# Altium PCB МПСУ.464342.21-005 T5M 4Layer.PcbDoc
Units mm, origin at the board's own origin, x right, y up, seen from the top; angles counter-clockwise.
Board outline 110 x 82.5 mm, 4 copper layers (Top Layer, RF_Ground, PWR, Bottom Layer), stack 1.167 mm thick; 67 components, 36 nets, 235 pads, 1466 vias.
Unrouted connection lines stored in the file: 90.
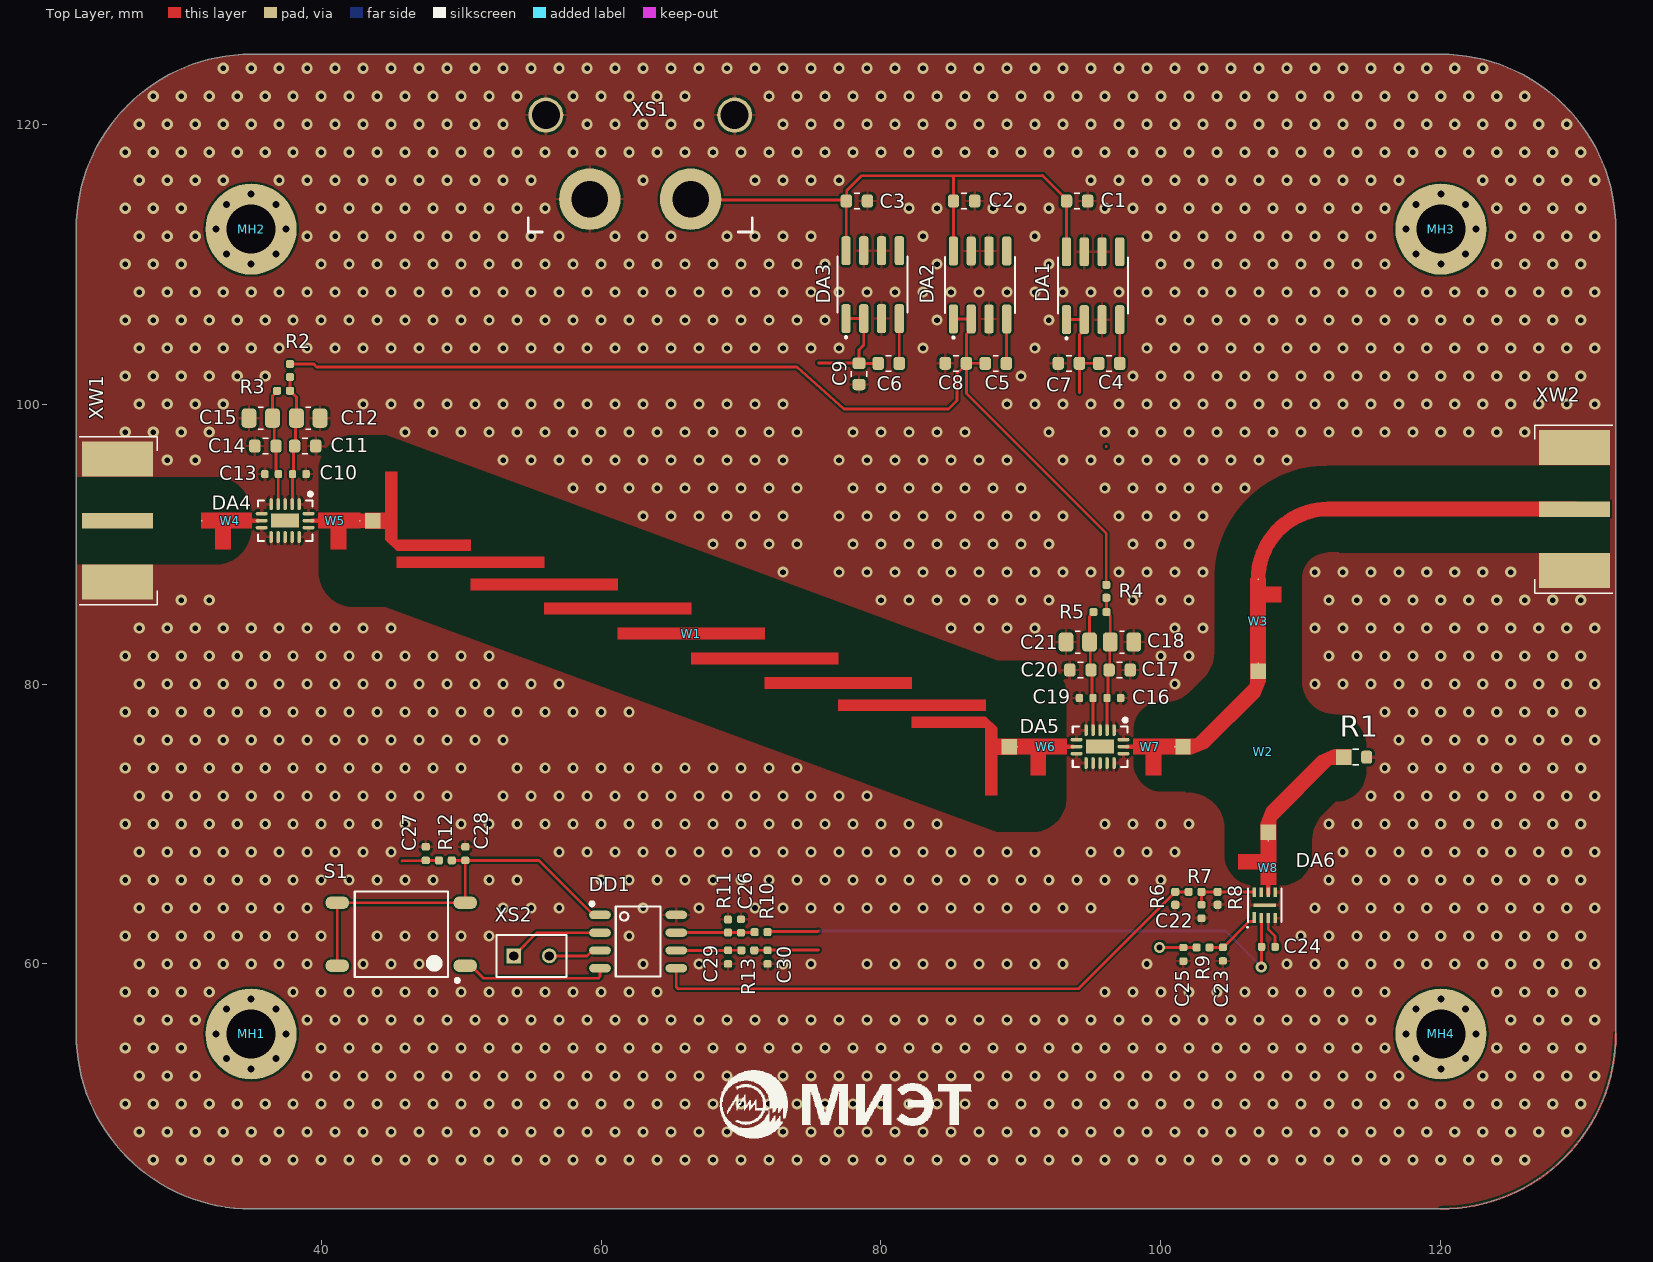
[diagram p0: Top Layer view]
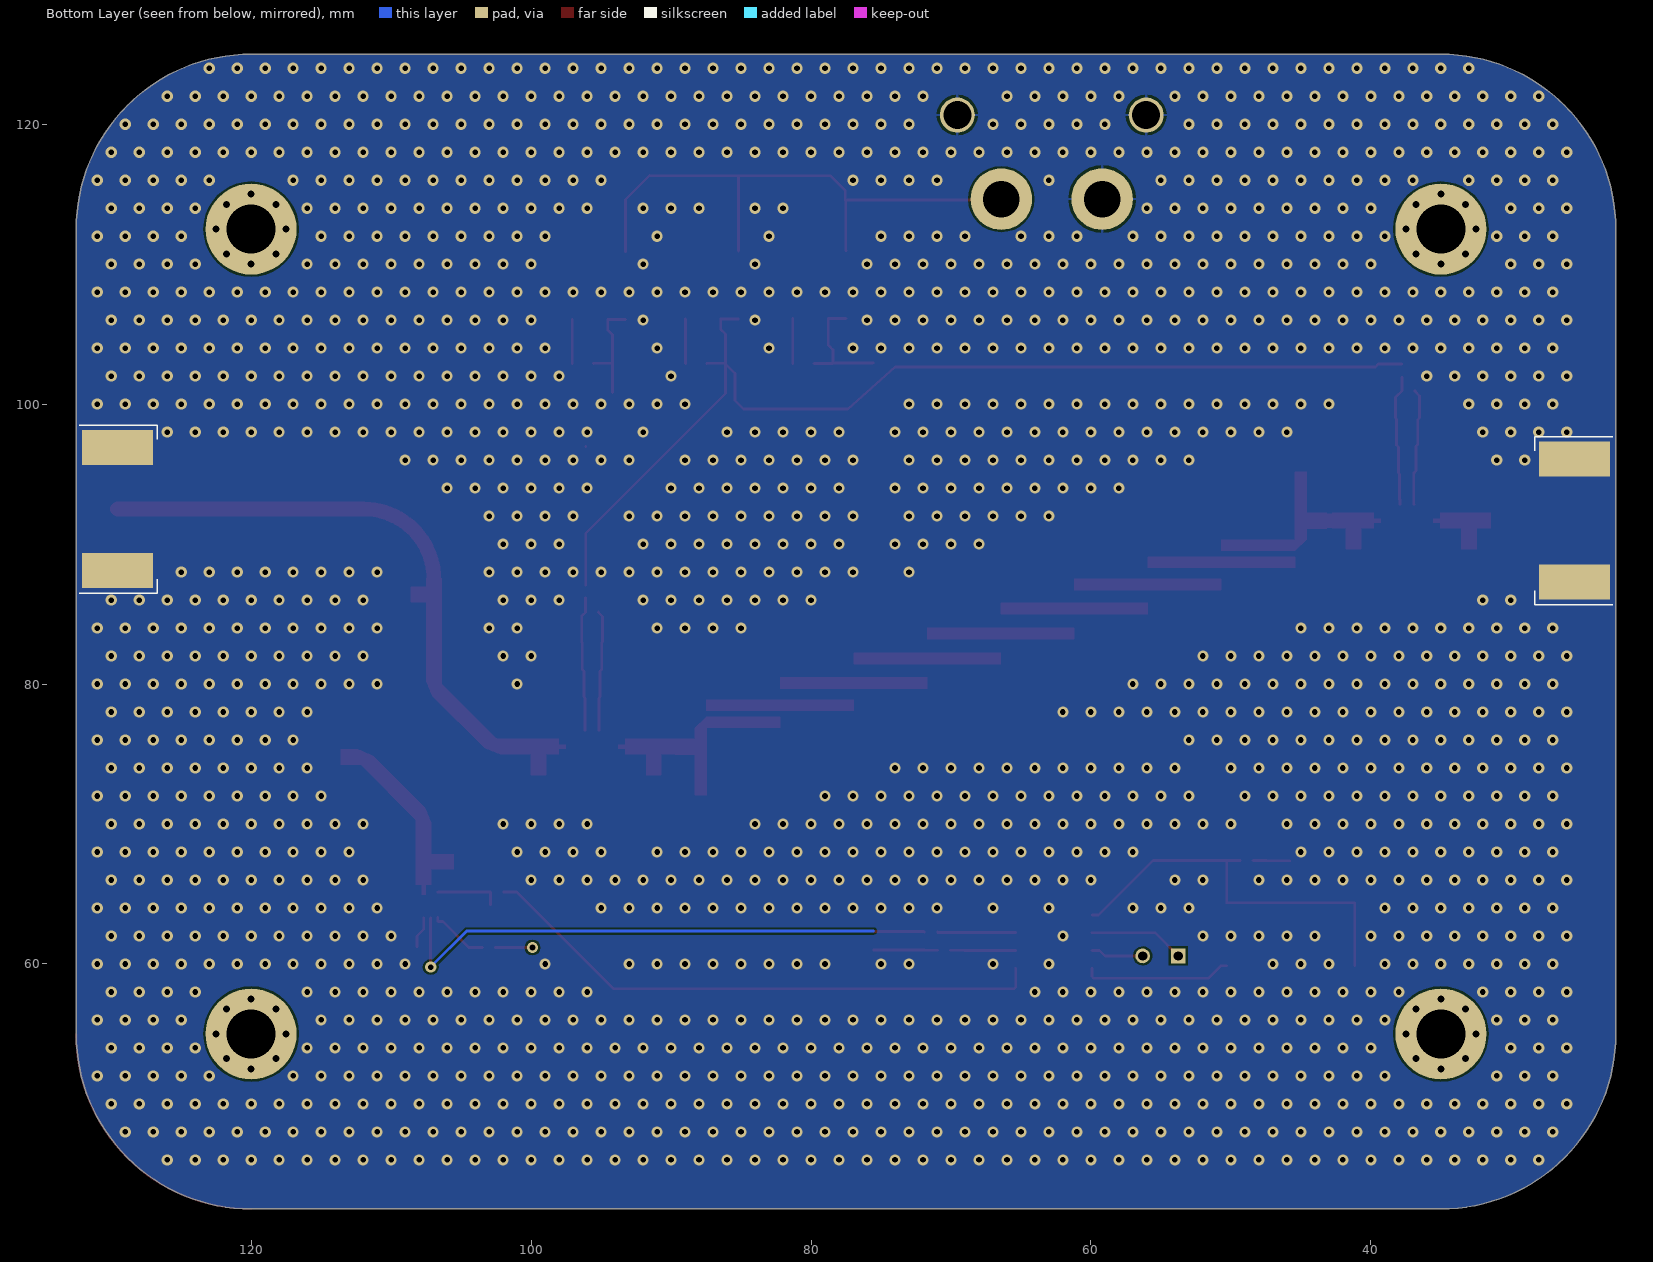
[diagram p1: Bottom Layer view, seen from below]
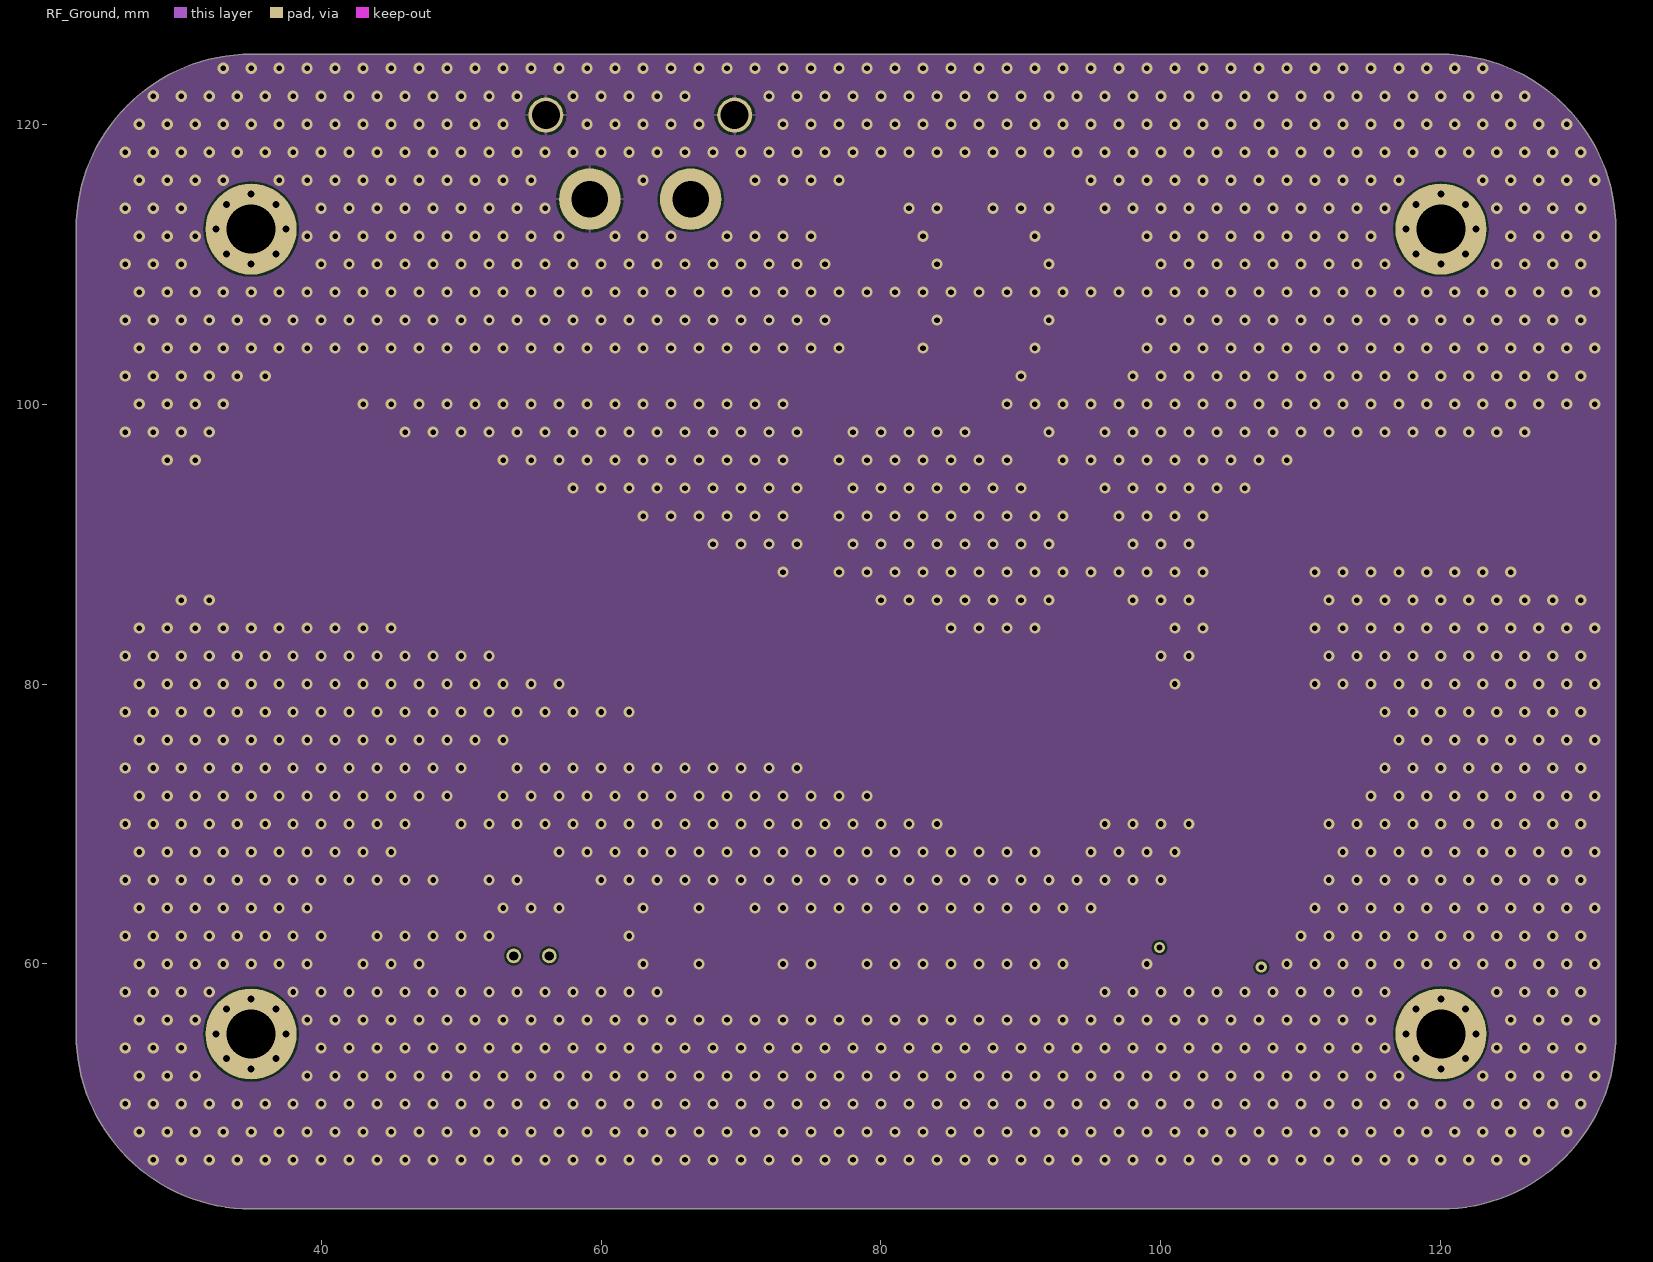
[diagram p2: RF_Ground]
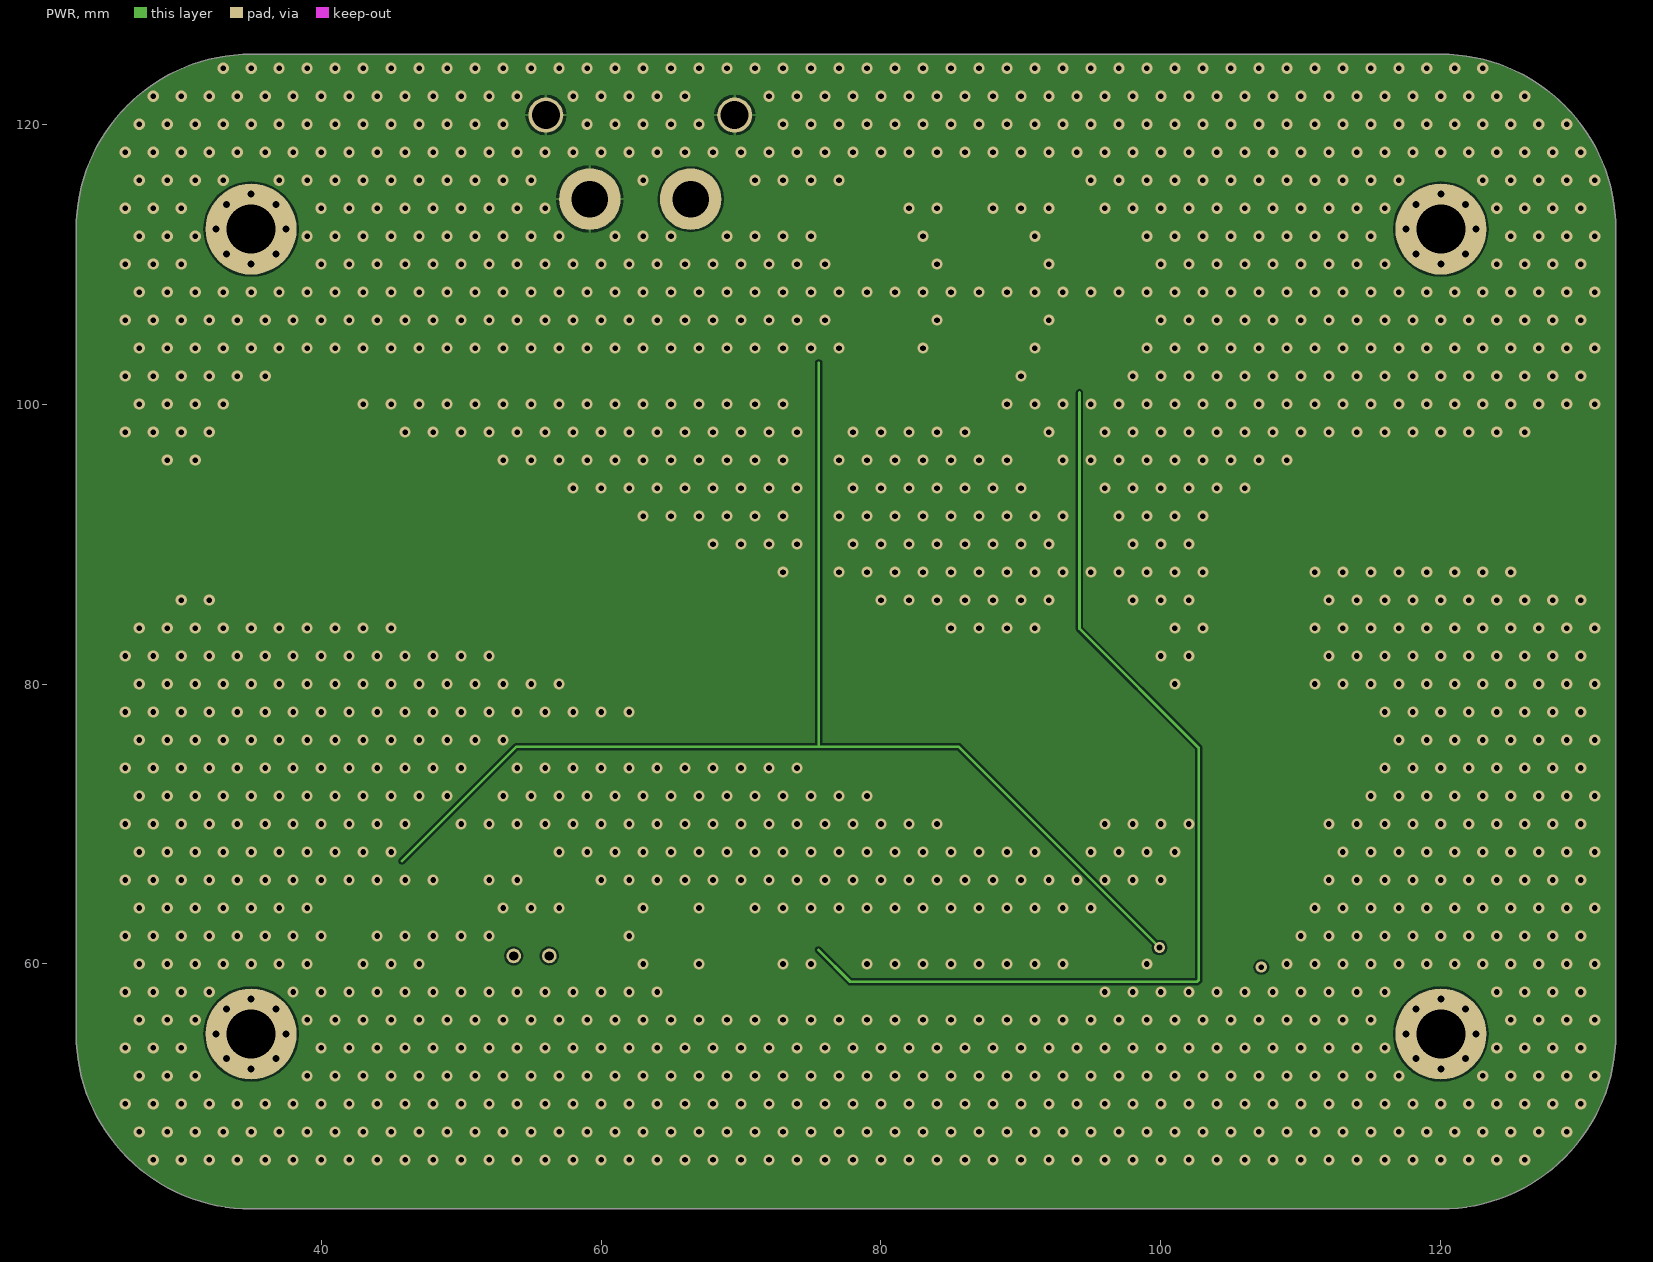
[diagram p3: PWR]

## Layer stack, top to bottom
Top Solder: solder mask 0.0102, Solder Resist, Dk 3.5
Top Layer: signal copper 0.018
RF_Dielectric: core 0.51, FR4, Dk 4.6
RF_Ground: signal copper 0.018
Dielectric 1: prepreg 0.075, 49NP, Dk 4.4
PWR: signal copper 0.018
Dielectric 2: core 0.51, FR4, Dk 4.6
Bottom Layer: signal copper 0.018
Bottom Solder: solder mask 0.0102, Solder Resist, Dk 3.5

## Board outline
22.5,55 22.5,112.5 cw(c35,112.5) 35,125 120,125 cw(c120,112.5) 132.5,112.5 132.5,55 cw(c120,55) 120,42.5 35,42.5 cw(c35,55)

## Design rules (kind name [scope] priority, off if disabled: settings)
AcuteAngle [All] p1: minimum=6.00000000000000E+0001 checktracksonly=FALSE
BoardOutlineClearance [OnCopper] p1: gap=0.25 ignorepadtopadclearanceinfootprint=FALSE except(0: Poly-OutlineEdge)
Clearance Clearance_RFGND [InComponentClass('RF') vs InNet('GND')] p1 off: gap=5 ignorepadtopadclearanceinfootprint=FALSE
Clearance [All] p2: gap=0.15 ignorepadtopadclearanceinfootprint=FALSE
ComponentClearance ComponentClearance_Matching [InComponentClass('RF')] p1: gap=-3 collisioncheckmode=3 verticalgap=2540 showdistances=FALSE
ComponentClearance [All] p2: gap=0.2 collisioncheckmode=3 verticalgap=2540 showdistances=TRUE
HoleSize [All] p1: absolutevalues=TRUE maxlimit=3.5 minlimit=0.4 maxpercent=80.000 minpercent=20.000
HoleToHoleClearance [All] p1: gap=0.2 allowstackedmicrovias=FALSE
MinimumAnnularRing MinimumAnnularRingVIA [IsVia] p1: minimumring=0.15
MinimumAnnularRing MinimumAnnularRingPAD [IsPad] p2: minimumring=0.2
MinimumSolderMaskSliver [All] p1: minsoldermaskwidth=0.15
PermittedLayers [All] p1: toplayerpermitted=TRUE bottomlayerpermitted=TRUE
PolygonConnect PolygonConnectMH [HasFootprint('MH_M3')] p1: connectstyle=Relief reliefconductorwidth=0.3 reliefentries=4 polygonreliefangle="90 Angle" airgapwidth=0.5
PolygonConnect PolygonConnectFilterGND [IsPad and InComponent('W1') and InNet('GND')] p2: connectstyle=Direct reliefconductorwidth=0.254 reliefentries=4 polygonreliefangle="90 Angle" airgapwidth=0.254
PolygonConnect PolygonConnectRFCons [InComponentClass('RFCons') and InNet('GND')] p3: connectstyle=Direct reliefconductorwidth=0.254 reliefentries=4 polygonreliefangle="90 Angle" airgapwidth=0.254
PolygonConnect PolygonConnectGNDVia [IsVia and InNet('GND')] p4: connectstyle=Direct reliefconductorwidth=0.254 reliefentries=4 polygonreliefangle="90 Angle" airgapwidth=0.254
PolygonConnect PolygonConnectRF [InNet('GND') and InComponentClass('RF')] p5: connectstyle=Relief reliefconductorwidth=0.2 reliefentries=4 polygonreliefangle="90 Angle" airgapwidth=0.2
PolygonConnect [All] p6: connectstyle=Relief reliefconductorwidth=0.2 reliefentries=4 polygonreliefangle="90 Angle" airgapwidth=0.2
RoutingCorners RoutingCorners_RF [InNetClass('RF')] p1: cornerstyle=Round minsetback=1.1 maxsetback=5
RoutingCorners [All] p2: cornerstyle=45-Degree minsetback=2.54 maxsetback=2.54
RoutingLayers RoutingLayersRF [InNetClass('RF')] p1: top layer_v5=TRUE mid layer 1_v5=TRUE mid layer 2_v5=TRUE bottom layer_v5=FALSE
RoutingLayers [All] p2: top layer_v5=TRUE mid layer 1_v5=TRUE mid layer 2_v5=TRUE bottom layer_v5=TRUE
RoutingVias [All] p1: holewidth=0.4 width=0.8 viastyle="Through Hole" minholewidth=0.4 minwidth=0.8 maxholewidth=0.4 maxwidth=0.8
SilkToSilkClearance [All] p1: silktosilkclearance=0.15
SilkToSolderMaskClearance [IsPad] p1: minsilkscreentomaskgap=0.15 clearancetoexposedcopper=TRUE
SolderMaskExpansion SolderMaskExpansionGNDVia [IsVia and InNet('GND')] p1: expansion=0.102 istentingtop=TRUE
SolderMaskExpansion [All] p2: expansion=0.05 istentingtop=FALSE
UnConnectedPin [All] p1:
Width WidthRF [InNetClass('RF')] p1: maxlimit=1.15 minlimit=1.05 preferedwidth=1.1
Width [All] p2: maxlimit=0.5 minlimit=0.2 preferedwidth=0.3
22 further rules are at their usual default settings.

## Classes and differential pairs
component class RFDevices: DA4 DA5 DA6
component class RFCons: XW1 XW2
component class RF: W1 W2 W3 W4 W5 W6 W7 W8
channel class "МПСУ.464342.21-005 Э3 Лист2": LNA1 LNA2
net class RF: LNA_RF_IN_LNA1 LNA_RF_IN_LNA2 LNA_RF_OUT_LNA1 LNA_RF_OUT_LNA2 LTC_RF_IN NetDA4_7 NetDA4_15 NetDA5_7 NetDA5_15 NetDA6_6 NetR1_2 NetW2_3 NetW3_2
component class "МПСУ.464342.21-005 Э3 Лист8": R1 W1 W2 W3 XS1 XW1 XW2
component class PowerManagment: C1 C2 C3 C4 C5 C6 C7 C8 C9 DA1 DA2 DA3
component class PowerDetector: C22 C23 C24 C25 C26 DA6 R6 R7 R8 R9 R10 R11 W8
component class Microcontroller: C27 C28 C29 C30 DD1 R12 R13 S1 XS2
component class LNA2: C16 C17 C18 C19 C20 C21 DA5 R4 R5 W6 W7
component class LNA1: C10 C11 C12 C13 C14 C15 DA4 R2 R3 W4 W5

## Components (designator, comment, footprint, x,y, rotation, side; value= is the part's Value field where it differs from the comment)
C1 "1 uF" CAPC160X80X90L30N 94.01,114.51 r180 top value="100 pF"
C2 "1 uF" CAPC160X80X90L30N 85.935,114.51 r180 top value="100 pF"
C3 "1 uF" CAPC160X80X90L30N 78.28,114.51 r180 top value="100 pF"
C4 "10 pF" CAPC160X80X90L30N 96.305,102.91 r0 top value="100 pF"
C5 "10 pF" CAPC160X80X90L30N 88.2,102.91 r0 top value="100 pF"
C6 "10 pF" CAPC160X80X90L30N 80.55,102.91 r0 top value="100 pF"
C7 "10 uF" CAPC160X80X90L30N 93.425,102.915 r0 top value="100 pF"
C8 "10 uF" CAPC160X80X90L30N 85.345,102.915 r0 top value="100 pF"
C9 "10 uF" CAPC160X80X90L30N 78.43,102.155 r90 top value="100 pF"
C10 "100 pF" CAPC100X50X55L20N 38.44,95 r180 top
C11 "1 uF" CAPC160X80X90L30N 38.855,97 r180 top value="100 pF"
C12 "0.33 uF" CAPC200X125X95L50N 39.075,99 r180 top value="100 pF"
C13 "100 pF" CAPC100X50X55L20N 36.465,95 r180 top
C14 "1 uF" CAPC160X80X90L30N 36.02,97 r180 top value="100 pF"
C15 "0.33 uF" CAPC200X125X95L50N 35.685,99 r180 top value="100 pF"
C16 "100 pF" CAPC100X50X55L20N 96.635,79 r180 top (schematic designator C10)
C17 "1 uF" CAPC160X80X90L30N 97.05,81 r180 top value="100 pF" (schematic designator C11)
C18 "0.33 uF" CAPC200X125X95L50N 97.225,83 r180 top value="100 pF" (schematic designator C12)
C19 "100 pF" CAPC100X50X55L20N 94.665,79 r180 top (schematic designator C13)
C20 "1 uF" CAPC160X80X90L30N 94.25,81 r180 top value="100 pF" (schematic designator C14)
C21 "0.33 uF" CAPC200X125X95L50N 94.06,83 r180 top value="100 pF" (schematic designator C15)
C22 "10 pF" CAPC100X50X55L20N 102.9,63.75 r90 top value="100 pF" (schematic designator C16)
C23 "OPT" CAPC100X50X55L20N 104.425,60.7 r90 top value="100 pF" (schematic designator C17)
C24 "10 nF" CAPC100X50X55L20N 107.675,61.225 r180 top value="100 pF" (schematic designator C18)
C25 "100 nF" CAPC100X50X55L20N 101.6,60.69 r90 top value="100 pF" (schematic designator C19)
C26 "1 uF" CAPC100X50X55L20N 70,62.715 r270 top value="100 pF" (schematic designator C20)
C27 "100 nF" CAPC100X50X55L20N 47.475,67.885 r270 top (schematic designator C21)
C28 "OPT" CAPC100X50X55L20N 50.3,67.885 r270 top (schematic designator C22)
C29 "OPT" CAPC100X50X55L20N 69.075,60.49 r90 top (schematic designator C23)
C30 "100 nF" CAPC100X50X55L20N 71.9,60.49 r90 top (schematic designator C24)
DA1 "LT1763-1.5" SOIC8P127_490X600X175L83X41N 95.155,108.46 r0 top
DA2 "LT1763-2.5" SOIC8P127_490X600X175L83X41N 87.08,108.51 r0 top
DA3 "LT1763-3.3" SOIC8P127_490X600X175L83X41N 79.405,108.535 r0 top
DA4 "PMA-183PLN+" JV2579 37.425,91.675 r180 top
DA5 "PMA-183PLN+" JV2579 95.65,75.525 r180 top (schematic designator DA4)
DA6 "LTC5597" LTC5597 107.425,64.2 r0 top (schematic designator DA5)
DD1 "PIC12F1822-I/SN" SN-SOIC127P600X175-8N 62.65,61.6 r0 top
MH1 "Comment" MH_M3#1 35,55 r0 top
MH2 "Comment" MH_M3#2 35,112.5 r0 top
MH3 "Comment" MH_M3#3 120,112.5 r0 top
MH4 "Comment" MH_M3#4 120,55 r0 top
R1 "50 Ohm" RESC160X80X60L30N 113.925,74.775 r180 top value=10
R2 "10 Ohm" RESC100X50X40L25N 37.775,102.4 r270 top value=10
R3 "180 Ohm" RESC100X50X40L25N 37.315,100.95 r180 top value=10
R4 "10 Ohm" RESC100X50X40L25N 96.1,86.625 r270 top value=10 (schematic designator R2)
R5 "180 Ohm" RESC100X50X40L25N 95.65,85.15 r180 top value=10 (schematic designator R3)
R6 "OPT" RESC100X50X40L25N 101.025,64.69 r90 top value=10 (schematic designator R4)
R7 "2 kOhm" RESC100X50X40L25N 102.44,65.15 r0 top value=10 (schematic designator R5)
R8 "3 k" RESC100X50X40L25N 104.05,64.69 r90 top value=10 (schematic designator R6)
R9 "1 Ohm" RESC100X50X40L25N 103.015,61.175 r180 top value=10 (schematic designator R7)
R10 "100 Ohm" RESC100X50X40L25N 71.43,62.275 r180 top value=10 (schematic designator R8)
R11 "OPT" RESC100X50X40L25N 69.065,62.71 r270 top value=10 (schematic designator R9)
R12 "1 Ohm" RESC100X50X40L25N 48.875,67.4 r180 top (schematic designator R10)
R13 "1 Ohm" RESC100X50X40L25N 70.485,60.975 r0 top value=10 (schematic designator R11)
S1 "L-KLS7-TS6604-4.3-180-B" DIP2_SOIC450P1000X350-4N 45.725,62.125 r180 top
W1 "Filter" MFilter8_5G 43.15,91.675 r0 top net-tie
W2 "Colinear Coupler" CLCoupler 107.675,69.4 r90 top net-tie
W3 "Matching" MATCHING_MAIN_OUT 106.95,81.45 r90 top net-tie
W4 "Matching" MATCHING_LNA_IN 35.525,91.675 r0 top net-tie
W5 "Matching" MATCHING_LNA_OUT 39.3,91.675 r0 top net-tie
W6 "Matching" MATCHING_LNA_IN 93.786,75.529 r0 top net-tie (schematic designator W4)
W7 "Matching" MATCHING_LNA_OUT 97.525,75.525 r0 top net-tie (schematic designator W5)
W8 "Matching" MATCHING_LTC_IN 107.675,64.95 r270 top net-tie (schematic designator W6)
XS1 "XT-60-PW-F" XT-60-PW-F 62.8,114.65 r0 top
XS2 "PBD-2 2x1" RHDRV2W45P254_1X2_304X500H500 53.76,60.575 r90 top
XW1 "MOLEX 73251-1153" "MOLEX 73251-1153 - 1.1pin" 22.5,91.675 r0 top
XW2 "MOLEX 73251-1153" "MOLEX 73251-1153 - 1.1pin" 132.5,92.5 r180 top

## Footprints (in the part's own frame and the unit in brackets; to place one, negate y for a bottom-side part, rotate by r counter-clockwise, add the part's x,y. Pads: shape width x height; smd on the part's side, far side on the other; paste and mask are expansions set on the pad)
CAPC100X50X55L20N [mm] "Capacitor, Chip; 1.00 mm L X 0.50 mm W X 0.55 mm H body"
  rrect49% 0.53x0.58 smd: 1(-0.485,0) 2(0.485,0)
  body extent -0.5,-0.25 0.5,0.25, height 0.55
CAPC160X80X90L30N [mm] "Capacitor, Chip; 1.60 mm L X 0.80 mm W X 0.90 mm H body"
  rrect51% 0.82x0.93 smd: 1(-0.755,0) 2(0.755,0)
  silkscreen extent -0.2,-0.55 0.2,0.55, body extent -0.8,-0.4 0.8,0.4, height 0.9
CAPC200X125X95L50N [mm] "Capacitor, Chip; 2.00 mm L X 1.25 mm W X 0.95 mm H body"
  rrect48% 1.05x1.38 smd: 1(-0.84,0) 2(0.84,0)
  silkscreen extent -0.17,-0.78 0.17,0.78, body extent -1,-0.63 1,0.63, height 0.95
CLCoupler [mm] "Coupler 40 dB, diel RO4003 0.5 oz ED 20 mil"
  rect 1.1x1.1 smd paste-0.55 mask-0.55: 1(0,0) 2(5.375,-5.375) 3(11.5,0.725) 4(6.125,6.1)
  Top Layer region: 5.575,6.65 5.575,5.42 6.007,4.35 9.725,0.625 10.8,0.175 12.05,0.175 12.05,1.275 10.65,1.275 10.525,1.4 6.785,5.128 6.675,5.25 6.675,6.65
  Top Layer region: -0.55,0.55 -0.55,-0.55 0.875,-0.549 0.987,-0.67 4.713,-4.397 4.825,-4.5 4.825,-5.925 5.925,-5.925 5.925,-4.675 5.491,-3.619 1.765,0.108 0.7,0.55
DIP2_SOIC450P1000X350-4N [mm] "SOIP=C, 4-Leads, Body 6,00x6,00mm, Pitch 4,50mm, IPC Medium Density"
  oval 1.7x0.9 smd: 1(-4.575,2.25) 2(-4.575,-2.25) 3(4.575,-2.25) 4(4.575,2.25)
  silkscreen extent -4.13,-3.05 3.32,3.42, body extent -4.5,-3 4.5,3, height 7.17
JV2579 [mm] "QFN, 17-Leads, Body   2.5x3.5mm, Pitch 0.51mm, Thermal Pad 2x1mm, IPC Medium Density"
  oval 0.25x0.85 smd: 1(-1,-1.175) 2(-0.5,-1.175) 3(0,-1.175) 4(0.5,-1.175) 5(1,-1.175) 9(1,1.175) 10(0.5,1.175) 11(0,1.175) 12(-0.5,1.175) 13(-1,1.175)
  oval 0.85x0.25 smd: 6(1.675,-0.5) 7(1.675,0) 8(1.675,0.5) 14(-1.675,0.5) 15(-1.675,0) 16(-1.675,-0.5)
  rect 2x1 smd: 17(0,0)
  silkscreen extent -1.95,-2.02 1.95,1.45, body extent -1.8,-1.3 1.8,1.3, height 0.85
LTC5597 [mm] "DFN 8-Leads, Body 2,00x2,00mm, Pitch 0,50mm, Thermal Pad 1,60x0,25mm, IPC Medium Density"
  rect 0.25x0.8 smd: 1(-0.75,-0.875)
  rect 0.25x0.7 smd: 2(-0.25,-0.925) 3(0.25,-0.925) 4(0.75,-0.925) 5(0.75,0.925) 6(0.25,0.925) 7(-0.25,0.925) 8(-0.75,0.925)
  rect 1.6x0.25 smd: 9(0,0)
  silkscreen extent -1.3,-1.62 1.2,1.2, body extent -1.05,-1.1 1.05,1.1, height 0.8
MATCHING_LNA_IN [mm]
  rect 0.1x0.1 smd paste-0.05 mask-0.05: 1(-4.05,0) 2(0,0)
  Top Layer region: -3.1,-2.05 -3.1,-0.55 -4.1,-0.55 -4.1,0.55 -0.5,0.55 -0.5,0.15 0,0.15 0,-0.15 -0.5,-0.15 -0.5,-0.55 -2,-0.55 -2,-2.05
MATCHING_LNA_OUT [mm]
  rect 0.1x0.1 smd paste-0.05 mask-0.05: 1(0,0) 2(3.45,0)
  Top Layer region: 0.5,-0.55 0.5,-0.15 0,-0.15 0,0.15 0.5,0.15 0.5,0.55 3.5,0.55 3.5,-0.55 2.5,-0.55 2.5,-2.05 1.4,-2.05 1.4,-0.55
MATCHING_LTC_IN [mm]
  rect 0.1x0.1 smd paste-0.05 mask-0.05: 1(-3.85,0) 2(0,0)
  Top Layer region: -2.9,-2.15 -2.9,-0.55 -3.9,-0.55 -3.9,0.55 -0.7,0.55 -0.7,0.15 0,0.15 0,-0.15 -0.7,-0.15 -0.7,-0.55 -1.8,-0.55 -1.8,-2.15
MATCHING_MAIN_OUT [mm]
  rect 0.1x0.1 smd paste-0.05 mask-0.05: 1(0.05,0) 2(6.05,0)
  Top Layer region: 0,-0.55 0,0.55 6.1,0.55 6.1,-0.55 5.5,-0.55 5.5,-1.65 4.4,-1.65 4.4,-0.55
MFilter8_5G [mm] "Bandpass filter, Fc 8.50GHz, BW  500 MHz, type - Coupled Microstrip Filter, diel RO4003 0.5 oz ED 20 mil"
  rect 1.1x1.1 smd paste-0.55 mask-0.55: 1(0.55,0) 2(46.025,-16.146)
  Top Layer region: 0,-0.577 0,0.577 1.432,0.577 1.432,3.476 2.279,3.476 2.279,-1.352 7.555,-1.352 7.555,-2.146 2.253,-2.146 1.432,-1.352 1.432,-0.577
  Top Layer region: 2.253,-3.36 2.253,-2.566 12.8,-2.566 12.8,-3.36
  Top Layer region: 7.555,-4.962 18.045,-4.964 18.045,-4.14 7.555,-4.142
  Top Layer region: 12.8,-6.7 12.8,-5.877 18.045,-5.877 18.045,-5.876 23.293,-5.876 23.293,-6.7 18.045,-6.7 18.045,-6.7
  Top Layer region: 18.045,-8.485 18.045,-7.661 23.293,-7.661 28.541,-7.661 28.541,-8.485 23.293,-8.485
  Top Layer region: 23.293,-10.27 28.541,-10.27 28.541,-10.269 33.786,-10.269 33.786,-9.446 28.541,-9.446 28.541,-9.446 23.293,-9.446
  Top Layer region: 28.541,-12.006 33.786,-12.006 33.786,-12.004 39.031,-12.004 39.031,-11.184 33.786,-11.184 33.786,-11.182 28.541,-11.182
  Top Layer region: 33.786,-13.581 33.786,-12.786 44.333,-12.786 44.333,-13.581
  Top Layer region: 44.307,-15.568 44.307,-14.794 39.031,-14.794 39.031,-14 44.333,-14 45.154,-14.794 45.154,-15.569 46.586,-15.569 46.586,-16.723 45.154,-16.723 45.154,-19.622 44.307,-19.622
MH_M3#1 [mm] "Mounting Hole M3 with 8 vias"
  round 0.8 hole 0.5: 1(-2.5,0) 1(-1.768,-1.768) 1(-1.768,1.768) 1(0,-2.5) 1(0,2.5) 1(1.768,-1.768) 1(1.768,1.768) 1(2.5,0)
  round 6.5 hole 3.5 paste-6.5: MH1(0,0)
MH_M3#2 [mm] "Mounting Hole M3 with 8 vias"
  round 0.8 hole 0.5: 1(-2.5,0) 1(-1.768,-1.768) 1(-1.768,1.768) 1(0,-2.5) 1(0,2.5) 1(1.768,-1.768) 1(1.768,1.768) 1(2.5,0)
  round 6.5 hole 3.5 paste-6.5: MH2(0,0)
MH_M3#3 [mm] "Mounting Hole M3 with 8 vias"
  round 0.8 hole 0.5: 1(-2.5,0) 1(-1.768,-1.768) 1(-1.768,1.768) 1(0,-2.5) 1(0,2.5) 1(1.768,-1.768) 1(1.768,1.768) 1(2.5,0)
  round 6.5 hole 3.5 paste-6.5: MH3(0,0)
MH_M3#4 [mm] "Mounting Hole M3 with 8 vias"
  round 0.8 hole 0.5: 1(-2.5,0) 1(-1.768,-1.768) 1(-1.768,1.768) 1(0,-2.5) 1(0,2.5) 1(1.768,-1.768) 1(1.768,1.768) 1(2.5,0)
  round 6.5 hole 3.5 paste-6.5: MH4(0,0)
"MOLEX 73251-1153 - 1.1pin" [mm] "MOLEX 50 Ohms, SMA Jack Receptacle, Edge Mount, .25µm Gold (Au) Plating"
  rect 5.1x1.1 smd: 1(2.95,0)
  rect 5.1x2.5 smd: 2(2.95,-4.4) 2(2.95,4.4)
  rect 5.1x2.5 smd far side: 2(2.95,-4.4) 2(2.95,4.4)
  silkscreen extent 0.2,-6 5.8,6, body extent -9.5,-4.76 4.77,4.76, height 4.36
RESC100X50X40L25N [mm] "Resistor, Chip; 1.00 mm L X 0.50 mm W X 0.40 mm H body"
  rrect52% 0.58x0.58 smd: 1(-0.46,0) 2(0.46,0)
  body extent -0.5,-0.25 0.5,0.25, height 0.4
RESC160X80X60L30N [mm] "Resistor, Chip; 1.60 mm L X 0.80 mm W X 0.60 mm H body"
  rrect51% 0.79x0.93 smd: 1(-0.77,0) 2(0.77,0)
  silkscreen extent -0.23,-0.56 0.23,0.56, body extent -0.8,-0.4 0.8,0.4, height 0.6
RHDRV2W45P254_1X2_304X500H500 [mm] "Header, Vertical Receptacle, 2.54 mm pitch; 0.45 mm lead width, 2 pins, 2 rows, 1 pin per row, 3.04 mm L X 5.00 mm W X 5.00 mm H body"
  rect 1.05x1.05 / inner round 1.05 / far side rect 1.05x1.05 hole 0.65 paste-1.05: 1(0,0)
  round 1.05 hole 0.65 paste-1.05: 2(0,-2.54)
  silkscreen extent -1.5,-3.77 1.5,1.23, body extent -1.52,-3.77 1.52,1.23, height 5
SN-SOIC127P600X175-8N [mm] "SOIC, 8-Leads, Body 4.90x3.90mm, Pitch 1.27mm, IPC Medium Density"
  oval 1.55x0.6 smd: 1(-2.725,1.905) 2(-2.725,0.635) 3(-2.725,-0.635) 4(-2.725,-1.905) 5(2.725,-1.905) 6(2.725,-0.635) 7(2.725,0.635) 8(2.725,1.905)
  silkscreen extent -3.42,-2.5 1.6,2.82, body extent -3,-2.5 3,2.5, height 1.75
SOIC8P127_490X600X175L83X41N [mm] "Small Outline IC (SOIC), 1.27 mm pitch; 8 pin, 4.90 mm L X 3.90 mm W X 1.75 mm H body"
  rrect52% 0.66x2.07 smd: 1(-1.905,-2.425) 2(-0.635,-2.425) 3(0.635,-2.425) 4(1.905,-2.425) 5(1.905,2.425) 6(0.635,2.425) 7(-0.635,2.425) 8(-1.905,2.425)
  silkscreen extent -2.5,-3.83 2.5,2, body extent -2.45,-3 2.45,3, height 1.75
XT-60-PW-F [mm]
  round 4.4 hole 2.6: 1(-3.6,0) 2(3.6,0)
  round 2.5 hole 2: 3(-6.75,6) 3(6.75,6)
  silkscreen extent -8,-2.35 8,-1.35, body extent -7.75,-1.85 7.75,15.35, height 8.4

## Part data
C1 C2 C3 C4 C5 C6 C7 C8 C9 C10 C11 C12 C13 C14 C15 C16 C17 C18 C19 C20 C21 C22 C23 C24 C25 C26 C27 C28 C29 C30: library part Capacitor, "Capacitor, generic", Package=0402
DA1 DA2 DA3: library part LT1763, "Micropower DC/DC Converters in SOIC8", Manufacturer="Analog Devices"
DA4 DA5: "SMT Low Noise Amplifier, 6000 - 18000 MHz, 50Ω", Manufacturer=Mini-Circuits, ComponentLink1Description=ProductPage, ComponentLink1URL=https://www.minicircuits.com/WebStore/dashboard.html?model=PMA-183PLN%2B, PartNumber=PMA-183PLN+
DA6: "100MHz to 70GHz Linear-in-dB RMS Power Detector with 35dB Dynamic Range", Manufacturer="Analog Devices", ComponentLink1Description="Product Page", ComponentLink1URL=https://www.analog.com/en/products/ltc5597.html#product-overview, PartNumber=LTC5597
DD1: library part PIC12(L)F1822, "8-bit Flash Microcontrollers with XLP Technology 3.5 KB, 128 B", PartNumber=PIC12F1822-I/SN
R1 R2 R3 R4 R5 R6 R7 R8 R9 R10 R11 R12 R13: library part Resistor, "Resistor, generic", Package=0402
S1: library part KLS7-TS6601-7, "Tact Switch", Manufacturer="KLS electronic co ltd", ComponentLink1Description=DataSheet, ComponentLink1URL=https://static.chipdip.ru/lib/551/DOC001551970.pdf, PartNumber=L-KLS7-TS6604-4.3-180-B
W1: library part "Filter 8.5G", "Bandpass filter, Fc 8.50GHz, BW  500 MHz, type - Coupled Microstrip Filter, diel RO4003 0.5 oz ED 20 mil"
W2: library part CLCoupler, "Coupler 40 dB, diel RO4003 0.5 oz ED 20 mil"
W3 W8: library part Matching_1
W4 W5 W6 W7: library part Matching_1, "Matching MTEE"
XS1: "Header, Right-angle, 2x1", Manufactorer="Changzhou Amass Electronics CO.LTD.", Category=Connector, ComponentLink1Description=DataSheet, ComponentLink1URL=https://www.tme.eu/ru/Document/9b8d0c5eb7094295f3d3112c214d3ade/XT60PW%20SPEC.pdf, Net1=+12V, Net2=GND, PartNumber=XT-60-PW-F
XS2: library part PBD-2, "Header, Vertical Receptacle, 2.54 mm pitch 2x1", Net1=RX, Net2=TX, PartNumber="PBD-2 2x1"
XW1 XW2: "MOLEX 73251-1153 (SMA EDGE)", Manufacturer=Molex, PartNumber="MOLEX 73251-1153"

## Via types
v1: diameter 0.8, hole 0.4, Top Layer to Bottom Layer, 1466 vias

## Nets (pads, with @x,y where several pads share a name; then routed paths per layer and width w, separated by ;. In a path a pad name is that pad's centre, name@x,y a point inside that pad or via, vN(x,y) a via of type N, cw(c..) or ccw(c..) an arc to the next point about the centre after c; other vN are vias at no path point)
+1.5V: C4.1 C7.2 C30.2 DA1.1 DA1.2 R13.2 | length 86.3
  Top Layer w0.2: R13.2 C30.2 71.912,60.988 75.513,60.988 75.525,61 ; DA1.1 DA1.2 94.52,105.291 94.18,104.951 C7.2 ; 94.175,100.825 94.178,100.827 94.178,102.913 C7.2 ; C4.1 95.548,102.913 94.182,102.913 C7.2
  PWR w0.2: 75.525,61 77.8,58.725 102.583,58.725 102.7,58.842 102.7,75.431 94.175,83.956 94.175,100.825
+2.5V: C5.1 C8.2 DA2.1 DA2.2 R2.1 R4.1 | length 77.9
  Top Layer w0.2: R2.1 39.471,102.86 39.681,102.65 74,102.65 77.35,99.65 77.731,99.65 84.819,99.65 85.438,100.269 85.438,102.198 C8.2@86.1,102.86 ; DA2.1 DA2.2 86.445,105.341 86.1,104.996 C8.2 ; C5.1 87.442,102.913 86.102,102.913 C8.2 ; 96.092,96.975 96.1,96.967 ; R4.1 96.1,90.75 86.1,100.75 C8.2@86.1,102.86 ; C8.2@86.1,102.86 C8.2
+3.3V: C6.1 C9.2 C25.2 C27.2 DA3.1 DA3.2 R9.2 R12.2 | length 105.1
  Top Layer w0.2: 45.775,67.35 45.8,67.375 47.45,67.375 C27.2 R12.2 ; 75.55,102.95 75.57,102.93 78.41,102.93 C9.2 ; DA3.1 DA3.2 78.77,104.217 78.43,103.877 C9.2 ; C6.1 C9.2 ; v1(99.9,61.175) C25.2 R9.2
  PWR w0.2: 45.775,67.35 53.95,75.525 85.55,75.525 v1(99.9,61.175) ; 75.55,75.525 75.55,102.95
ADC_IN: C26.2 DD1.7 R10.2 R11.2 | length 5.6
  Top Layer w0.2: DD1.7 65.382,62.243 69.058,62.243 R11.2 ; R11.2@69.078,62.263 69.1,62.24 69.99,62.24 C26.2 70.023,62.253 70.948,62.253 R10.2
ADC_VREF: C29.2 DD1.6 R13.1 | length 4.7
  Top Layer w0.2: DD1.6 65.38,60.97 69.07,60.97 C29.2 R13.1
DC_IN: C1.2 C2.2 C3.2 DA1.5 DA1.8 DA2.5 DA2.8 DA3.5 DA3.8 XS1.2 | length 41.4
  Top Layer w0.2: XS1.2 66.47,114.58 77.455,114.58 C3.2 77.525,110.985 cw(c77.5,110.985) DA3.8 ; C3.2@77.55,114.58 77.55,115.275 78.585,116.31 85.18,116.31 ; DA2.8 85.175,114.51 C2.2 85.18,116.31 ; DA1.8 93.25,114.51 C1.2 93.255,114.62 91.55,116.325 85.18,116.31
EN: DD1.5 R6.2 R7.1 | length 40.9
  Top Layer w0.2: DD1.5 65.375,58.342 65.492,58.225 94.1,58.225 R6.2 R7.1
GND: C1.1 C2.1 C3.1 C7.1 C8.1 C9.1 C10.1 C11.1 C12.1 C13.2 C14.2 C15.2 C16.1 C17.1 C18.1 C19.2 C20.2 C21.2 C22.1 C23.1 C25.1 C26.1 C27.1 C28.1 C29.1 C30.1 DA1.3 DA1.6 DA1.7 DA2.3 DA2.6 DA2.7 DA3.3 DA3.6 DA3.7 DA4.1 DA4.3 DA4.5 DA4.6 DA4.8 DA4.9 DA4.10 DA4.11 DA4.12 DA4.13 DA4.14 DA4.16 DA4.17 DA5.1 DA5.3 DA5.5 DA5.6 DA5.8 DA5.9 DA5.10 DA5.11 DA5.12 DA5.13 DA5.14 DA5.16 DA5.17 DA6.4 DA6.5 DA6.7 DA6.9 DD1.8 R1.1 R6.1 R8.1 R11.1 XS1.1 XS1.3 XW1.2 XW2.2
  other v1: 28,46 30,46 32,46 34,46 36,46 38,46 40,46 42,46 44,46 46,46 48,46 50,46 52,46 54,46 56,46 58,46 60,46 62,46 64,46 66,46 68,46 70,46 72,46 74,46 76,46 78,46 80,46 82,46 84,46 86,46 88,46 90,46 92,46 94,46 96,46 98,46 100,46 102,46 104,46 106,46 108,46 110,46 112,46 114,46 116,46 118,46 120,46 122,46 124,46 126,46 27,48 29,48 31,48 33,48 35,48 37,48 39,48 41,48 43,48 45,48 47,48 49,48 51,48 53,48 55,48 57,48 59,48 61,48 63,48 65,48 67,48 69,48 71,48 73,48 75,48 77,48 79,48 81,48 83,48 85,48 87,48 89,48 91,48 93,48 95,48 97,48 99,48 101,48 103,48 105,48 107,48 109,48 111,48 113,48 115,48 117,48 119,48 121,48 123,48 125,48 127,48 129,48 26,50 28,50 30,50 32,50 34,50 36,50 38,50 40,50 42,50 44,50 46,50 48,50 50,50 52,50 54,50 56,50 58,50 60,50 62,50 64,50 66,50 68,50 70,50 72,50 74,50 76,50 78,50 80,50 82,50 84,50 86,50 88,50 90,50 92,50 94,50 96,50 98,50 100,50 102,50 104,50 106,50 108,50 110,50 112,50 114,50 116,50 118,50 120,50 122,50 124,50 126,50 128,50 130,50 27,52 29,52 31,52 39,52 41,52 43,52 45,52 47,52 49,52 51,52 53,52 55,52 57,52 59,52 61,52 63,52 65,52 67,52 69,52 71,52 73,52 75,52 77,52 79,52 81,52 83,52 85,52 87,52 89,52 91,52 93,52 95,52 97,52 99,52 101,52 103,52 105,52 107,52 109,52 111,52 113,52 115,52 117,52 123,52 125,52 127,52 129,52 131,52 26,54 28,54 30,54 40,54 42,54 44,54 46,54 48,54 50,54 52,54 54,54 56,54 58,54 60,54 62,54 64,54 66,54 68,54 70,54 72,54 74,54 76,54 78,54 80,54 82,54 84,54 86,54 88,54 90,54 92,54 94,54 96,54 98,54 100,54 102,54 104,54 106,54 108,54 110,54 112,54 114,54 116,54 124,54 126,54 128,54 130,54 27,56 29,56 31,56 39,56 41,56 43,56 45,56 47,56 49,56 51,56 53,56 55,56 57,56 59,56 61,56 63,56 65,56 67,56 69,56 71,56 73,56 75,56 77,56 79,56 81,56 83,56 85,56 87,56 89,56 91,56 93,56 95,56 97,56 99,56 101,56 103,56 105,56 107,56 109,56 111,56 113,56 115,56 125,56 127,56 129,56 131,56 26,58 28,58 30,58 32,58 38,58 40,58 42,58 44,58 46,58 48,58 50,58 52,58 54,58 56,58 58,58 60,58 62,58 64,58 96,58 98,58 100,58 102,58 104,58 106,58 108,58 110,58 112,58 114,58 116,58 124,58 126,58 128,58 130,58 27,60 29,60 31,60 33,60 35,60 37,60 39,60 43,60 45,60 47,60 63,60 67,60 73,60 75,60 79,60 81,60 83,60 85,60 87,60 89,60 91,60 93,60 99,60 109,60 111,60 113,60 115,60 117,60 119,60 121,60 123,60 125,60 127,60 129,60 131,60 26,62 28,62 30,62 32,62 34,62 36,62 38,62 40,62 44,62 46,62 48,62 50,62 52,62 62,62 110,62 112,62 114,62 116,62 118,62 120,62 122,62 124,62 126,62 128,62 130,62 27,64 29,64 31,64 33,64 35,64 37,64 39,64 53,64 55,64 57,64 63,64 67,64 71,64 73,64 75,64 77,64 79,64 81,64 83,64 85,64 87,64 89,64 91,64 93,64 95,64 111,64 113,64 115,64 117,64 119,64 121,64 123,64 125,64 127,64 129,64 131,64 26,66 28,66 30,66 32,66 34,66 36,66 38,66 40,66 42,66 44,66 46,66 48,66 52,66 54,66 60,66 62,66 64,66 66,66 68,66 70,66 72,66 74,66 76,66 78,66 80,66 82,66 84,66 86,66 88,66 90,66 92,66 94,66 96,66 98,66 100,66 112,66 114,66 116,66 118,66 120,66 122,66 124,66 126,66 128,66 130,66 27,68 29,68 31,68 33,68 35,68 37,68 39,68 41,68 43,68 45,68 57,68 59,68 61,68 63,68 65,68 67,68 69,68 71,68 73,68 75,68 77,68 79,68 81,68 83,68 85,68 87,68 89,68 91,68 95,68 97,68 99,68 101,68 113,68 115,68 117,68 119,68 121,68 123,68 125,68 127,68 129,68 131,68 26,70 28,70 30,70 32,70 34,70 36,70 38,70 40,70 42,70 44,70 46,70 50,70 52,70 54,70 56,70 58,70 60,70 62,70 64,70 66,70 68,70 70,70 72,70 74,70 76,70 78,70 80,70 82,70 84,70 96,70 98,70 100,70 102,70 112,70 114,70 116,70 118,70 120,70 122,70 124,70 126,70 128,70 130,70 27,72 29,72 31,72 33,72 35,72 37,72 39,72 41,72 43,72 45,72 47,72 49,72 53,72 55,72 57,72 59,72 61,72 63,72 65,72 67,72 69,72 71,72 73,72 75,72 77,72 79,72 115,72 117,72 119,72 121,72 123,72 125,72 127,72 129,72 131,72 26,74 28,74 30,74 32,74 34,74 36,74 38,74 40,74 42,74 44,74 46,74 48,74 50,74 54,74 56,74 58,74 60,74 62,74 64,74 66,74 68,74 70,74 72,74 74,74 116,74 118,74 120,74 122,74 124,74 126,74 128,74 130,74 27,76 29,76 31,76 33,76 35,76 37,76 39,76 41,76 43,76 45,76 47,76 49,76 51,76 53,76 117,76 119,76 121,76 123,76 125,76 127,76 129,76 131,76 26,78 28,78 30,78 32,78 34,78 36,78 38,78 40,78 42,78 44,78 46,78 48,78 50,78 52,78 54,78 56,78 58,78 60,78 62,78 116,78 118,78 120,78 122,78 124,78 126,78 128,78 130,78 27,80 29,80 31,80 33,80 35,80 37,80 39,80 41,80 43,80 45,80 47,80 49,80 51,80 53,80 55,80 57,80 101,80 111,80 113,80 115,80 117,80 119,80 121,80 123,80 125,80 127,80 129,80 131,80 26,82 28,82 30,82 32,82 34,82 36,82 38,82 40,82 42,82 44,82 46,82 48,82 50,82 52,82 100,82 102,82 112,82 114,82 116,82 118,82 120,82 122,82 124,82 126,82 128,82 130,82 27,84 29,84 31,84 33,84 35,84 37,84 39,84 41,84 43,84 45,84 85,84 87,84 89,84 91,84 101,84 103,84 111,84 113,84 115,84 117,84 119,84 121,84 123,84 125,84 127,84 129,84 131,84 30,86 32,86 80,86 82,86 84,86 86,86 88,86 90,86 92,86 98,86 100,86 102,86 112,86 114,86 116,86 118,86 120,86 122,86 124,86 126,86 128,86 130,86 73,88 77,88 79,88 81,88 83,88 85,88 87,88 89,88 91,88 93,88 95,88 97,88 99,88 101,88 103,88 111,88 113,88 115,88 117,88 119,88 121,88 123,88 125,88 68,90 70,90 72,90 74,90 78,90 80,90 82,90 84,90 86,90 88,90 90,90 92,90 98,90 100,90 102,90 63,92 65,92 67,92 69,92 71,92 73,92 77,92 79,92 81,92 83,92 85,92 87,92 89,92 91,92 93,92 97,92 99,92 101,92 103,92 58,94 60,94 62,94 64,94 66,94 68,94 70,94 72,94 74,94 78,94 80,94 82,94 84,94 86,94 88,94 90,94 96,94 98,94 100,94 102,94 104,94 106,94 29,96 31,96 53,96 55,96 57,96 59,96 61,96 63,96 65,96 67,96 69,96 71,96 73,96 77,96 79,96 81,96 83,96 85,96 87,96 89,96 93,96 95,96 97,96 99,96 101,96 103,96 105,96 107,96 109,96 26,98 28,98 30,98 32,98 46,98 48,98 50,98 52,98 54,98 56,98 58,98 60,98 62,98 64,98 66,98 68,98 70,98 72,98 74,98 78,98 80,98 82,98 84,98 86,98 92,98 96,98 98,98 100,98 102,98 104,98 106,98 108,98 110,98 112,98 114,98 116,98 118,98 120,98 122,98 124,98 126,98 27,100 29,100 31,100 33,100 43,100 45,100 47,100 49,100 51,100 53,100 55,100 57,100 59,100 61,100 63,100 65,100 67,100 69,100 71,100 73,100 89,100 91,100 93,100 95,100 97,100 99,100 101,100 103,100 105,100 107,100 109,100 111,100 113,100 115,100 117,100 119,100 121,100 123,100 125,100 127,100 129,100 131,100 26,102 28,102 30,102 32,102 34,102 36,102 90,102 98,102 100,102 102,102 104,102 106,102 108,102 110,102 112,102 114,102 116,102 118,102 120,102 122,102 124,102 126,102 128,102 130,102 27,104 29,104 31,104 33,104 35,104 37,104 39,104 41,104 43,104 45,104 47,104 49,104 51,104 53,104 55,104 57,104 59,104 61,104 63,104 65,104 67,104 69,104 71,104 73,104 75,104 77,104 83,104 91,104 99,104 101,104 103,104 105,104 107,104 109,104 111,104 113,104 115,104 117,104 119,104 121,104 123,104 125,104 127,104 129,104 131,104 26,106 28,106 30,106 32,106 34,106 36,106 38,106 40,106 42,106 44,106 46,106 48,106 50,106 52,106 54,106 56,106 58,106 60,106 62,106 64,106 66,106 68,106 70,106 72,106 74,106 76,106 84,106 92,106 100,106 102,106 104,106 106,106 108,106 110,106 112,106 114,106 116,106 118,106 120,106 122,106 124,106 126,106 128,106 130,106 27,108 29,108 31,108 33,108 35,108 37,108 39,108 41,108 43,108 45,108 47,108 49,108 51,108 53,108 55,108 57,108 59,108 61,108 63,108 65,108 67,108 69,108 71,108 73,108 75,108 77,108 79,108 81,108 83,108 85,108 87,108 89,108 91,108 93,108 95,108 97,108 99,108 101,108 103,108 105,108 107,108 109,108 111,108 113,108 115,108 117,108 119,108 121,108 123,108 125,108 127,108 129,108 131,108 26,110 28,110 30,110 40,110 42,110 44,110 46,110 48,110 50,110 52,110 54,110 56,110 58,110 60,110 62,110 64,110 66,110 68,110 70,110 72,110 74,110 76,110 84,110 92,110 100,110 102,110 104,110 106,110 108,110 110,110 112,110 114,110 116,110 124,110 126,110 128,110 130,110 27,112 29,112 31,112 39,112 41,112 43,112 45,112 47,112 49,112 51,112 53,112 55,112 57,112 61,112 63,112 65,112 69,112 71,112 73,112 75,112 83,112 91,112 99,112 101,112 103,112 105,112 107,112 109,112 111,112 113,112 115,112 125,112 127,112 129,112 131,112 26,114 28,114 30,114 40,114 42,114 44,114 46,114 48,114 50,114 52,114 54,114 56,114 82,114 84,114 88,114 90,114 92,114 96,114 98,114 100,114 102,114 104,114 106,114 108,114 110,114 112,114 114,114 116,114 124,114 126,114 128,114 130,114 27,116 29,116 31,116 33,116 37,116 39,116 41,116 43,116 45,116 47,116 49,116 51,116 53,116 55,116 63,116 71,116 73,116 75,116 77,116 95,116 97,116 99,116 101,116 103,116 105,116 107,116 109,116 111,116 113,116 115,116 117,116 123,116 125,116 127,116 129,116 131,116 26,118 28,118 30,118 32,118 34,118 36,118 38,118 40,118 42,118 44,118 46,118 48,118 50,118 52,118 54,118 56,118 58,118 60,118 62,118 64,118 66,118 68,118 70,118 72,118 74,118 76,118 78,118 80,118 82,118 84,118 86,118 88,118 90,118 92,118 94,118 96,118 98,118 100,118 102,118 104,118 106,118 108,118 110,118 112,118 114,118 116,118 118,118 120,118 122,118 124,118 126,118 128,118 130,118 27,120 29,120 31,120 33,120 35,120 37,120 39,120 41,120 43,120 45,120 47,120 49,120 51,120 53,120 59,120 61,120 63,120 65,120 67,120 73,120 75,120 77,120 79,120 81,120 83,120 85,120 87,120 89,120 91,120 93,120 95,120 97,120 99,120 101,120 103,120 105,120 107,120 109,120 111,120 113,120 115,120 117,120 119,120 121,120 123,120 125,120 127,120 129,120 28,122 30,122 32,122 34,122 36,122 38,122 40,122 42,122 44,122 46,122 48,122 50,122 52,122 54,122 58,122 60,122 62,122 64,122 66,122 72,122 74,122 76,122 78,122 80,122 82,122 84,122 86,122 88,122 90,122 92,122 94,122 96,122 98,122 100,122 102,122 104,122 106,122 108,122 110,122 112,122 114,122 116,122 118,122 120,122 122,122 124,122 126,122 33,124 35,124 37,124 39,124 41,124 43,124 45,124 47,124 49,124 51,124 53,124 55,124 57,124 59,124 61,124 63,124 65,124 67,124 69,124 71,124 73,124 75,124 77,124 79,124 81,124 83,124 85,124 87,124 89,124 91,124 93,124 95,124 97,124 99,124 101,124 103,124 105,124 107,124 109,124 111,124 113,124 115,124 117,124 119,124 121,124 123,124
LNA_RF_IN_LNA1: W4.1 XW1.1
LNA_RF_IN_LNA2: W1.2 W6.1
LNA_RF_OUT_LNA1: W1.1 W5.2 | length 0.9
  Top Layer w1.05: W5.2 W1.1
LNA_RF_OUT_LNA2: W2.4 W7.2
LTC_RF_IN: W2.1 W8.1
NetC4_2: C4.2 DA1.4 | length 3.1
  Top Layer w0.2: C4.2 DA1.4
NetC5_2: C5.2 DA2.4 | length 3.2
  Top Layer w0.2: C5.2 88.97,102.925 88.97,106.07 DA2.4
NetC6_2: C6.2 DA3.4 | length 3.2
  Top Layer w0.2: C6.2 81.31,102.91 DA3.4
NetC10_2: C10.2 C11.2 C12.2 DA4.2 R2.2 R3.1 | length 9.4
  Top Layer w0.2: R2.2 R3.1 38.235,100.49 C12.2 38.168,98.933 38.168,97.067 C11.2 38.028,96.927 38.028,95.073 C10.2 37.955,93.194 37.925,93.164 DA4.2
NetC13_1: C13.1 C14.1 C15.1 DA4.4 R3.2 | length 8.4
  Top Layer w0.2: R3.2 36.855,100.923 36.525,100.593 C15.1 36.65,98.875 36.65,97.125 C14.1 36.775,95.216 36.935,95.057 36.935,92.86 DA4.4
NetC16_2: C16.2 C17.2 C18.2 DA5.2 R4.2 R5.1 | length 9.7
  Top Layer w0.2: R4.2 96.105,86.16 96.105,85.155 R5.1 96.11,85.123 96.385,84.848 C18.2 96.34,82.955 96.34,81.045 C17.2 96.222,80.928 96.222,79.072 C16.2 DA5.2
NetC19_1: C19.1 C20.1 C21.1 DA5.4 R5.2 | length 8.7
  Top Layer w0.2: DA5.4 C19.1 95.077,79.073 95.077,80.928 C20.1 94.952,81.052 94.952,82.947 C21.1 94.9,84.833 95.19,85.123 R5.2
NetC22_2: C22.2 DA6.8 R7.2 R8.2 | length 4.7
  Top Layer w0.2: C22.2 R7.2 R8.2 106.65,65.15 DA6.8
NetC23_2: C23.2 DA6.1 R9.1 | length 4.3
  Top Layer w0.2: R9.1 103.48,61.18 104.42,61.18 C23.2 104.45,61.185 106.29,63.025 106.65,63.025 106.675,63.05 DA6.1
NetC24_1: C24.1 DA6.3 | length 2.3
  Top Layer w0.2: DA6.3 107.675,62.474 108.16,61.989 C24.1
NetC24_2: C24.2 DA6.2 R10.1 | length 39.9
  Top Layer w0.2: R10.1 71.928,62.313 75.488,62.313 75.525,62.35 ; v1(107.175,59.775) 107.183,59.783 107.183,63.267 DA6.2
  Bottom Layer w0.2: 75.525,62.35 104.6,62.35 v1(107.175,59.775)
NetDA4_7: DA4.7 W4.2
NetDA4_15: DA4.15 W5.1
NetDA5_7: DA5.7 W6.2
NetDA5_15: DA5.15 W7.1
NetDA6_6: DA6.6 W8.2
NetDD1_4: DD1.4 S1.1 | length 10.6
  Top Layer w0.2: S1.1 50.7,59.875 51.597,58.978 59.808,58.978 59.925,59.095 DD1.4
NetR1_2: R1.2 W2.2
NetW2_3: W2.3 W3.1
NetW3_2: W3.2 XW2.1 | length 25.5
  Top Layer w1.05: W3.2 cw(c111.95,87.5) 111.95,92.5 XW2.1
RX: DD1.2 XS2.1 | length 6.9
  Top Layer w0.2: XS2.1 55.42,62.235 DD1.2
TX: DD1.3 XS2.2 | length 3.8
  Top Layer w0.2: XS2.2 58.991,60.575 59.381,60.965 DD1.3
VCC: C28.2 DD1.1 R12.1 S1.2 S1.3 S1.4 | length 28.9
  Top Layer w0.2: S1.4 S1.3 S1.2 C28.2 ; R12.1 55.555,67.4 59.45,63.505 DD1.1
pads on no net: MH1.1 MH1.MH1 MH2.1 MH2.MH2 MH3.1 MH3.MH3 MH4.1 MH4.MH4
copper on no net: | length 19.6
  Top Layer w0.15: 120,42.5 ccw(c120,55) 132.5,55

## Polygon pours and split planes (outlines as drawn)
no net on Top Solder "NONET_L01_P-001" (solid): 106.925,65.65 cw(c106.925,68.05) 104.525,68.05 104.525,69.76 ccw(c101.985,69.76) 101.985,72.3 100.175,72.3 cw(c100.175,74.45) 98.025,74.45 98.025,76.7 cw(c100.025,76.7) 100.025,78.7 100.248,78.7 ccw(c100.248,81.24) 102.044,79.444 103.125,80.525 ccw(c101.495,82.155) 103.8,82.155 103.8,87.575 cw(c111.912,87.488) 112,95.6 132.5,95.6 132.5,89.383 111.883,89.383 ccw(c111.883,87.575) 110.075,87.575 110.075,80.15 ccw(c112.35,80.15) 112.35,77.875 112.975,77.875 cw(c112.975,76.15) 114.7,76.15 114.7,73.875 cw(c112.45,73.875) 112.45,71.625 111.569,70.744 ccw(c113.365,68.948) 110.825,68.948 110.825,68 cw(c108.475,68) 108.475,65.65
no net on Top Solder "NONET_L01_P-001" (solid): 39.8,88.04 ccw(c42.34,88.04) 42.34,85.5 44.625,85.5 88.1,69.475 ccw(c88.281,69.656) 88.281,69.4 90.8,69.4 ccw(c90.8,71.875) 93.275,71.875 93.275,79.16 ccw(c90.735,79.16) 90.735,81.7 88.225,81.7 44.6,97.8 42.325,97.8 ccw(c42.325,95.275) 39.8,95.275
no net on Top Solder "NONET_L01_P-001" (solid): 22.5,94.77 32.625,94.825 cw(c32.625,92.45) 35,92.45 35,91.065 cw(c32.46,91.065) 32.46,88.525 22.5,88.525
GND on Bottom Layer "GND_L04_P006" (solid, pour order 6): 22.5,55 22.5,112.5 cw(c35,112.5) 35,125 120,125 cw(c120,112.5) 132.5,112.5 132.5,55 cw(c120,55) 120,42.5 35,42.5 cw(c35,55)
GND on Top Layer "Top Layer-GND" (solid, pour order 7): 22.5,55 22.5,112.5 cw(c35,112.5) 35,125 120,125 cw(c120,112.5) 132.5,112.5 132.5,55 cw(c120,55) 120,42.5 35,42.5 cw(c35,55)
GND on PWR "GND_L03_P009" (solid, pour order 9): 22.5,55 22.5,112.5 cw(c35,112.5) 35,125 120,125 cw(c120,112.5) 132.5,112.5 132.5,55 cw(c120,55) 120,42.5 35,42.5 cw(c35,55)
GND on RF_Ground "GND_L02_P010" (solid, pour order 10): 22.5,55 22.5,112.5 cw(c35,112.5) 35,125 120,125 cw(c120,112.5) 132.5,112.5 132.5,55 cw(c120,55) 120,42.5 35,42.5 cw(c35,55)

## Other copper
Top Layer:
  pour cut-out: 106.725,65.6 cw(c106.725,67.8) 104.525,67.8 104.525,69.71 ccw(c101.985,69.71) 101.985,72.25 101.725,72.25 110.1,80.975 110.1,80.15 ccw(c112.4,80.15) 112.4,77.85 cw(c112.4,75.555) 114.695,75.555 114.695,73.795 cw(c112.475,73.795) 112.475,71.575 111.569,70.669 ccw(c113.365,68.873) 110.825,68.873 110.825,67.85 cw(c108.575,67.85) 108.575,65.6
  pour cut-out: 98.025,76.725 cw(c100,76.725) 100,78.7 100.248,78.7 ccw(c100.248,81.24) 102.044,79.444 103.056,80.456 ccw(c101.26,82.252) 103.8,82.252 103.8,87.55 cw(c111.85,87.55) 111.85,95.6 132.05,95.6 ccw(c132.05,95.65) 132.1,95.65 132.1,89.35 112.75,89.35 cw(c112.75,89.4) 112.7,89.4 111.95,89.4 ccw(c111.95,87.55) 110.1,87.55 110.1,85.6 110.1,79.552 cw(c107.56,79.552) 109.356,77.756 104.644,73.044 cw(c102.848,74.84) 102.848,72.3 100.1,72.3 cw(c100.1,74.375) 98.025,74.375
  pour cut-out: 39.8,88.04 ccw(c42.34,88.04) 42.34,85.5 44.6,85.5 88.3,69.4 90.746,69.4 ccw(c90.746,71.94) 93.286,71.94 93.286,79.16 ccw(c90.746,79.16) 90.746,81.7 88.3,81.7 44.6,97.8 42.34,97.8 ccw(c42.34,95.26) 39.8,95.26
  pour cut-out: 35.025,92.225 ccw(c32.425,92.225) 32.425,94.825 22.5,94.825 22.5,88.515 30.5,88.515 30.5,88.525 32.425,88.525 ccw(c32.425,91.125) 35.025,91.125

## Silkscreen, mask and mechanical layers (free items; w line width, h text height)
Top Overlay:
  drawing of 6 lines, arcs and shapes, not listed